# EAGLE board CT_schematic (EAGLE 7.6.0)

Size 100 x 80 mm. Coordinates in mm from the lower left corner, seen from the top.
Outline: 0,0 100,0 100,80 0,80 0,0
Copper layers (1*16): Top 0.035mm / dielectric 1.5mm / Bottom 0.035mm
Design rules "default": minimum track width 10mil, minimum drill 24mil, track to track 8mil, track to pad 8mil, pad to pad 8mil, via to via 8mil, smd to smd 8mil, copper to edge 40mil, drill to drill 8mil, minimum pad ring 10mil, minimum via ring 8mil, stop-mask expansion 4mil, vias tented up to drill 0mil, thermal gap 10mil

## Footprints (pad centres in the part's own frame; a part is rotated, then mirrored left to right if it is on the bottom)
C0603 = smd 0.8 x 0.8: 1 -0.762,0; 2 0.762,0
C0402 = smd 0.5 x 0.5: 1 -0.508,0; 2 0.508,0
C0805 = smd 1.2 x 1.3: 1 -1.016,0; 2 1.016,0
C1210 = smd 1.2 x 2.5: 1 -1.524,0; 2 1.524,0
EXV-9H = smd 3.505 x 1.676: 1 -2.857,0; 2 2.857,0
L0603 = smd 0.8 x 0.8: 1 -0.762,0; 2 0.762,0
PJ-037B_PACKAGE = drill 3.7 square: 1 12,0 | drill 3.2 square: 2 6,0
R0603 = smd 0.8 x 0.8: 1 -0.762,0; 2 0.762,0
WLCSP49 = smd 0.25 x 0.25: A1 -1.2,1.2; A2 -0.8,1.2; A3 -0.4,1.2; A4 0,1.2; A5 0.4,1.2; A6 0.8,1.2; A7 1.2,1.2; B1 -1.2,0.8; B2 -0.8,0.8; B3 -0.4,0.8; B4 0,0.8; B5 0.4,0.8; B6 0.8,0.8; B7 1.2,0.8; C1 -1.2,0.4; C2 -0.8,0.4; C3 -0.4,0.4; C4 0,0.4; C5 0.4,0.4; C6 0.8,0.4; C7 1.2,0.4; D1 -1.2,0; D2 -0.8,0; D3 -0.4,0; D4 0,0; D5 0.4,0; D6 0.8,0; D7 1.2,0; E1 -1.2,-0.4; E2 -0.8,-0.4; E3 -0.4,-0.4; E4 0,-0.4; E5 0.4,-0.4; E6 0.8,-0.4; E7 1.2,-0.4; F1 -1.2,-0.8; F2 -0.8,-0.8; F3 -0.4,-0.8; F4 0,-0.8; F5 0.4,-0.8; F6 0.8,-0.8; F7 1.2,-0.8; G1 -1.2,-1.2; G2 -0.8,-1.2; G3 -0.4,-1.2; G4 0,-1.2; G5 0.4,-1.2; G6 0.8,-1.2; G7 1.2,-1.2
SAMTEC_FTSH-105-01-L-DV-K = smd 0.762 x 2.794: 1 -2.54,-2.032; 2 -2.54,2.032; 3 -1.27,-2.032; 4 -1.27,2.032; 5 0,-2.032; 6 0,2.032; 7 1.27,-2.032; 8 1.27,2.032; 9 2.54,-2.032; 10 2.54,2.032
QFN-16 = smd 0.813 x 0.305: 1 -1.448,0.75; 2 -1.448,0.25; 3 -1.448,-0.25; 4 -1.448,-0.75; 9 1.448,-0.75; 10 1.448,-0.25; 11 1.448,0.25; 12 1.448,0.75 | smd 0.305 x 0.813: 5 -0.75,-1.448; 6 -0.25,-1.448; 7 0.25,-1.448; 8 0.75,-1.448; 13 0.75,1.448; 14 0.25,1.448; 15 -0.25,1.448; 16 -0.75,1.448 | smd 1.803 x 1.803: 17 0,0
ABS07-32.768KHZ-7-T = smd 1.1 x 2.4: 1 -2.5,0; 2 0,0
ABLS-25.000MHZ-B2F-T = smd 5.6 x 2.8: 1 -3.81,0; 2 5.69,0
SOIC-8_EP = smd 1.6 x 0.533: 1 -2.921,1.905; 2 -2.921,0.635; 3 -2.921,-0.635; 4 -2.921,-1.905; 5 2.921,-1.905; 6 2.921,-0.635; 7 2.921,0.635; 8 2.921,1.905 | smd 2.54 x 3.302: EPAD 0,0 | drill 0.406 pad 0.406: P$1 -0.508,0.635; P$2 0.381,0.635; P$3 -0.508,-0.635; P$4 0.381,-0.635
SON-6 = smd 0.55 x 0.3: 1 -0.355,0.5 | smd 0.52 x 0.3: 2 -0.37,0; 3 -0.37,-0.5; 4 0.37,-0.5; 5 0.37,0; 6 0.37,0.5
SW_4-1437565-2 = smd 1.4 x 2.1: 1 -2.23,4.55; 2 -2.23,-4.55; 3 2.23,4.55; 4 2.23,-4.55
LGM67K-G1J2-24-Z = smd 0.8 x 1.4: A -2,0; C 0,0
NC7SZ125M5X = smd 1.3 x 0.7: 1 -1.3,0.95; 2 -1.3,0; 3 -1.3,-0.95; 4 1.3,-0.95; 5 1.3,0.95
DUMMY_PACKAGE_122 = drill 0.3: 1 0,-1; 2 1.5,-1; 3 3,-1

## Placement (x,y rotation side)
C1  1e-06  [C0603]  -19.05,55.88 0 top  (outside the outline)
C2  1e-07  [C0603]  -22.86,55.88 0 top  (outside the outline)
C3  1e-07  [C0603]  -26.67,55.88 0 top  (outside the outline)
C4  1e-07  [C0603]  -30.48,55.88 0 top  (outside the outline)
C5  1e-07  [C0603]  -34.29,55.88 0 top  (outside the outline)
C6  1e-07  [C0603]  -38.1,55.88 0 top  (outside the outline)
C7  4.7e-06  [C0603]  -59.69,50.8 0 top  (outside the outline)
C8  2.2e-06  [C0603]  -15.24,55.88 0 top  (outside the outline)
C9  1e-08  [C0603]  -41.91,55.88 0 top  (outside the outline)
C10  1e-06  [C0603]  -45.72,55.88 0 top  (outside the outline)
C11  1e-11  [C0402]  -41.91,60.96 0 top  (outside the outline)
C12  1e-11  [C0402]  -45.72,60.96 0 top  (outside the outline)
C13  1e-11  [C0402]  -49.53,60.96 0 top  (outside the outline)
C14  1e-11  [C0402]  -53.34,60.96 0 top  (outside the outline)
C15  1e-07  [C0402]  -57.15,60.96 0 top  (outside the outline)
C16  4.7e-06  [C0805]  -46.99,44.45 0 top  (outside the outline)
C17  1e-07  [C0402]  -60.96,60.96 0 top  (outside the outline)
C18  1e-07  [C0402]  -15.24,66.04 0 top  (outside the outline)
C19  1e-05  [C1210]  -57.15,36.83 0 top  (outside the outline)
C20  1e-05  [C1210]  -16.51,44.45 0 top  (outside the outline)
C21  1e-05  [C1210]  -22.86,44.45 0 top  (outside the outline)
C22  1e-05  [C1210]  -29.21,44.45 0 top  (outside the outline)
C23  1e-07  [C0402]  -19.05,66.04 0 top  (outside the outline)
C24  0.0001  [EXV-9H]  -36.83,19.05 0 top  (outside the outline)
C25  0.0001  [EXV-9H]  -48.26,19.05 0 top  (outside the outline)
C26  1e-08  [C0402]  -22.86,66.04 0 top  (outside the outline)
C27  1e-08  [C0402]  -26.67,66.04 0 top  (outside the outline)
F1  240.0  [L0603]  -49.53,55.88 0 top  (outside the outline)
J1  PJ-037B  [PJ-037B_PACKAGE]  -57.15,7.62 0 top  (outside the outline)
R1  10000.0  [R0603]  -62.23,44.45 0 top  (outside the outline)
R2  1000.0  [R0603]  -53.34,55.88 0 top  (outside the outline)
R3  1270.0  [R0603]  -57.15,55.88 0 top  (outside the outline)
R4  4700.0  [R0603]  -60.96,55.88 0 top  (outside the outline)
R5  2200.0  [R0603]  -15.24,60.96 0 top  (outside the outline)
R6  2200.0  [R0603]  -19.05,60.96 0 top  (outside the outline)
R7  10000.0  [R0603]  -15.24,50.8 0 top  (outside the outline)
R8  10000.0  [R0603]  -20.32,50.8 0 top  (outside the outline)
R9  10000.0  [R0603]  -25.4,50.8 0 top  (outside the outline)
R10  10000.0  [R0603]  -30.48,50.8 0 top  (outside the outline)
R11  10000.0  [R0603]  -35.56,50.8 0 top  (outside the outline)
R12  5.0  [R0603]  -22.86,60.96 0 top  (outside the outline)
R13  10000.0  [R0603]  -40.64,50.8 0 top  (outside the outline)
R14  2700.0  [R0603]  -26.67,60.96 0 top  (outside the outline)
R15  2200.0  [R0603]  -30.48,60.96 0 top  (outside the outline)
R16  10000.0  [R0603]  -45.72,50.8 0 top  (outside the outline)
R17  10000.0  [R0603]  -50.8,50.8 0 top  (outside the outline)
R18  18000.0  [R0603]  -55.88,50.8 0 top  (outside the outline)
R19  470000.0  [R0603]  -52.07,44.45 0 top  (outside the outline)
R20  120000.0  [R0603]  -57.15,44.45 0 top  (outside the outline)
U1  STM32F401CEY6  [WLCSP49]  -45.72,30.48 0 top  (outside the outline)
U2  FTSH-105-01-L-DV-K  [SAMTEC_FTSH-105-01-L-DV-K]  -35.56,7.62 0 top  (outside the outline)
U3  MMA8451QT  [QFN-16]  -35.56,60.96 0 top  (outside the outline)
U4  ABS07-32.768KHZ-7-T  [ABS07-32.768KHZ-7-T]  -27.94,38.1 0 top  (outside the outline)
U5  ABLS-25.000MHZ-B2F-T  [ABLS-25.000MHZ-B2F-T]  -26.67,30.48 0 top  (outside the outline)
U6  MIC5234YME  [SOIC-8_EP]  -36.83,36.83 0 top  (outside the outline)
U7  TPS3895ADRYR  [SON-6]  -35.56,64.77 0 top  (outside the outline)
U8  4-1437565-2  [SW_4-1437565-2]  -27.94,20.32 0 top  (outside the outline)
U9  Q65110A2395  [LGM67K-G1J2-24-Z]  -45.72,38.1 0 top  (outside the outline)
U10  nc7sz125m5x  [NC7SZ125M5X]  -34.29,44.45 0 top  (outside the outline)
U11  nc7sz125m5x  [NC7SZ125M5X]  -40.64,44.45 0 top  (outside the outline)
U12  Dummy  [DUMMY_PACKAGE_122]  -33.02,66.04 0 top  (outside the outline)

## Library data of the parts
C1-C27 F1 J1 R1-R20 U1-U12 = circuit_tree

## Nets
CLK_CRYSTAL_U1_C6: C11.1 U1.C6 U4.1
CLK_CRYSTAL_U1_C7: C12.1 U1.C7 U4.2
CLK_CRYSTAL_U1_D6: C13.1 U1.D6 U5.1
CLK_CRYSTAL_U1_D7: C14.1 U1.D7 U5.2
GND: C1.2 C2.2 C3.2 C4.2 C5.2 C6.2 C7.2 C8.2 C9.2 C10.2 C11.2 C12.2 C13.2 C14.2 C15.2 C16.2 C17.2 C18.2 C19.2 C20.2 C21.2 C22.2 C23.2 C24.2 C25.2 C26.2 C27.2 J1.2 R2.2 R7.2 R12.2 R13.2 R15.2 R18.2 R20.2 U1.A6 U1.B1 U1.D3 U1.E6 U2.3 U2.5 U3.5 U3.10 U3.12 U3.17 U6.7 U6.EPAD U7.2 U9.C U10.2 U10.3 U11.1 U11.3 U12.1
NET_U1_A5: R7.1 U1.A5
NET_U1_B5: R5.1 U1.B5 U3.4
NET_U1_B6: R8.1 U1.B6
NET_U1_C5: R6.1 U1.C5 U3.6
NET_U1_E7: R4.1 U1.E7 U11.4
NET_U1_F7: C9.1 C10.1 F1.1 U1.F7
NET_U1_G2: C8.1 U1.G2
NET_U1_G6: R3.1 U1.G6 U9.A
NET_U1_G7: R1.1 U1.G7 U8.3 U8.4
NET_U2_9: R12.1 U2.9
NET_U3_2: C18.1 U3.2
NET_U3_7: R13.1 U3.7
NET_U6_4: R14.2 R15.1 U6.4
NET_U7_1: R17.1 R18.1 U7.1
NET_U7_3: R19.2 R20.1 U7.3
NET_U7_4: R16.1 U7.4 U10.4 U11.2
NET_U8_1: R2.1 U8.1 U8.2
PROC_ADC1_IN2: U1.E5 U12.2
PROC_ADC1_IN3: U1.E4 U12.3
PROC_SYS_JTCK_SWCLK: R10.1 U1.A1 U2.4
PROC_SYS_JTDO_SWO: U1.A3 U2.6
PROC_SYS_JTMS_SWDIO: R11.1 U1.B3 U2.2
RST_OUT_U2_JTAG_RST_B: R9.1 U2.10 U10.1
VCC_S1_6V0: C19.1 C20.1 C24.1 C25.1 J1.1 U6.5 U6.8
VCC_TIER1_2V5: C1.1 C2.1 C3.1 C4.1 C5.1 C6.1 C7.1 C15.1 C16.1 C17.1 C21.1 C22.1 C23.1 C26.1 C27.1 F1.2 R1.2 R3.2 R4.2 R5.2 R6.2 R8.2 R9.2 R10.2 R11.2 R14.1 R16.2 R17.2 R19.1 U1.A7 U1.B2 U1.B7 U1.F2 U2.1 U3.1 U3.14 U6.1 U7.6 U10.5 U11.5

## Tracks (layer width: path | path; a pad name or v marks a point on that pad's centre or on a via)
CLK_CRYSTAL_U1_C6  (2 unrouted)
CLK_CRYSTAL_U1_C7  (2 unrouted)
CLK_CRYSTAL_U1_D6  (2 unrouted)
CLK_CRYSTAL_U1_D7  (2 unrouted)
GND  (53 unrouted)
NET_U1_A5  (1 unrouted)
NET_U1_B5  (2 unrouted)
NET_U1_B6  (1 unrouted)
NET_U1_C5  (2 unrouted)
NET_U1_E7  (2 unrouted)
NET_U1_F7  (3 unrouted)
NET_U1_G2  (1 unrouted)
NET_U1_G6  (2 unrouted)
NET_U1_G7  (3 unrouted)
NET_U2_9  (1 unrouted)
NET_U3_2  (1 unrouted)
NET_U3_7  (1 unrouted)
NET_U6_4  (2 unrouted)
NET_U7_1  (2 unrouted)
NET_U7_3  (2 unrouted)
NET_U7_4  (3 unrouted)
NET_U8_1  (2 unrouted)
PROC_ADC1_IN2  (1 unrouted)
PROC_ADC1_IN3  (1 unrouted)
PROC_SYS_JTCK_SWCLK  (2 unrouted)
PROC_SYS_JTDO_SWO  (1 unrouted)
PROC_SYS_JTMS_SWDIO  (2 unrouted)
RST_OUT_U2_JTAG_RST_B  (2 unrouted)
VCC_S1_6V0  (6 unrouted)
VCC_TIER1_2V5  (39 unrouted)